# Altium PCB PCB.PcbDoc
Units mil, origin at the board's own origin, x right, y up, seen from the top; angles counter-clockwise.
Board outline 1996.85 x 1458.58 mil, 2 copper layers (Top Layer, Bottom Layer), stack 61.855 mil thick; 58 components, 83 nets, 282 pads, 152 vias.
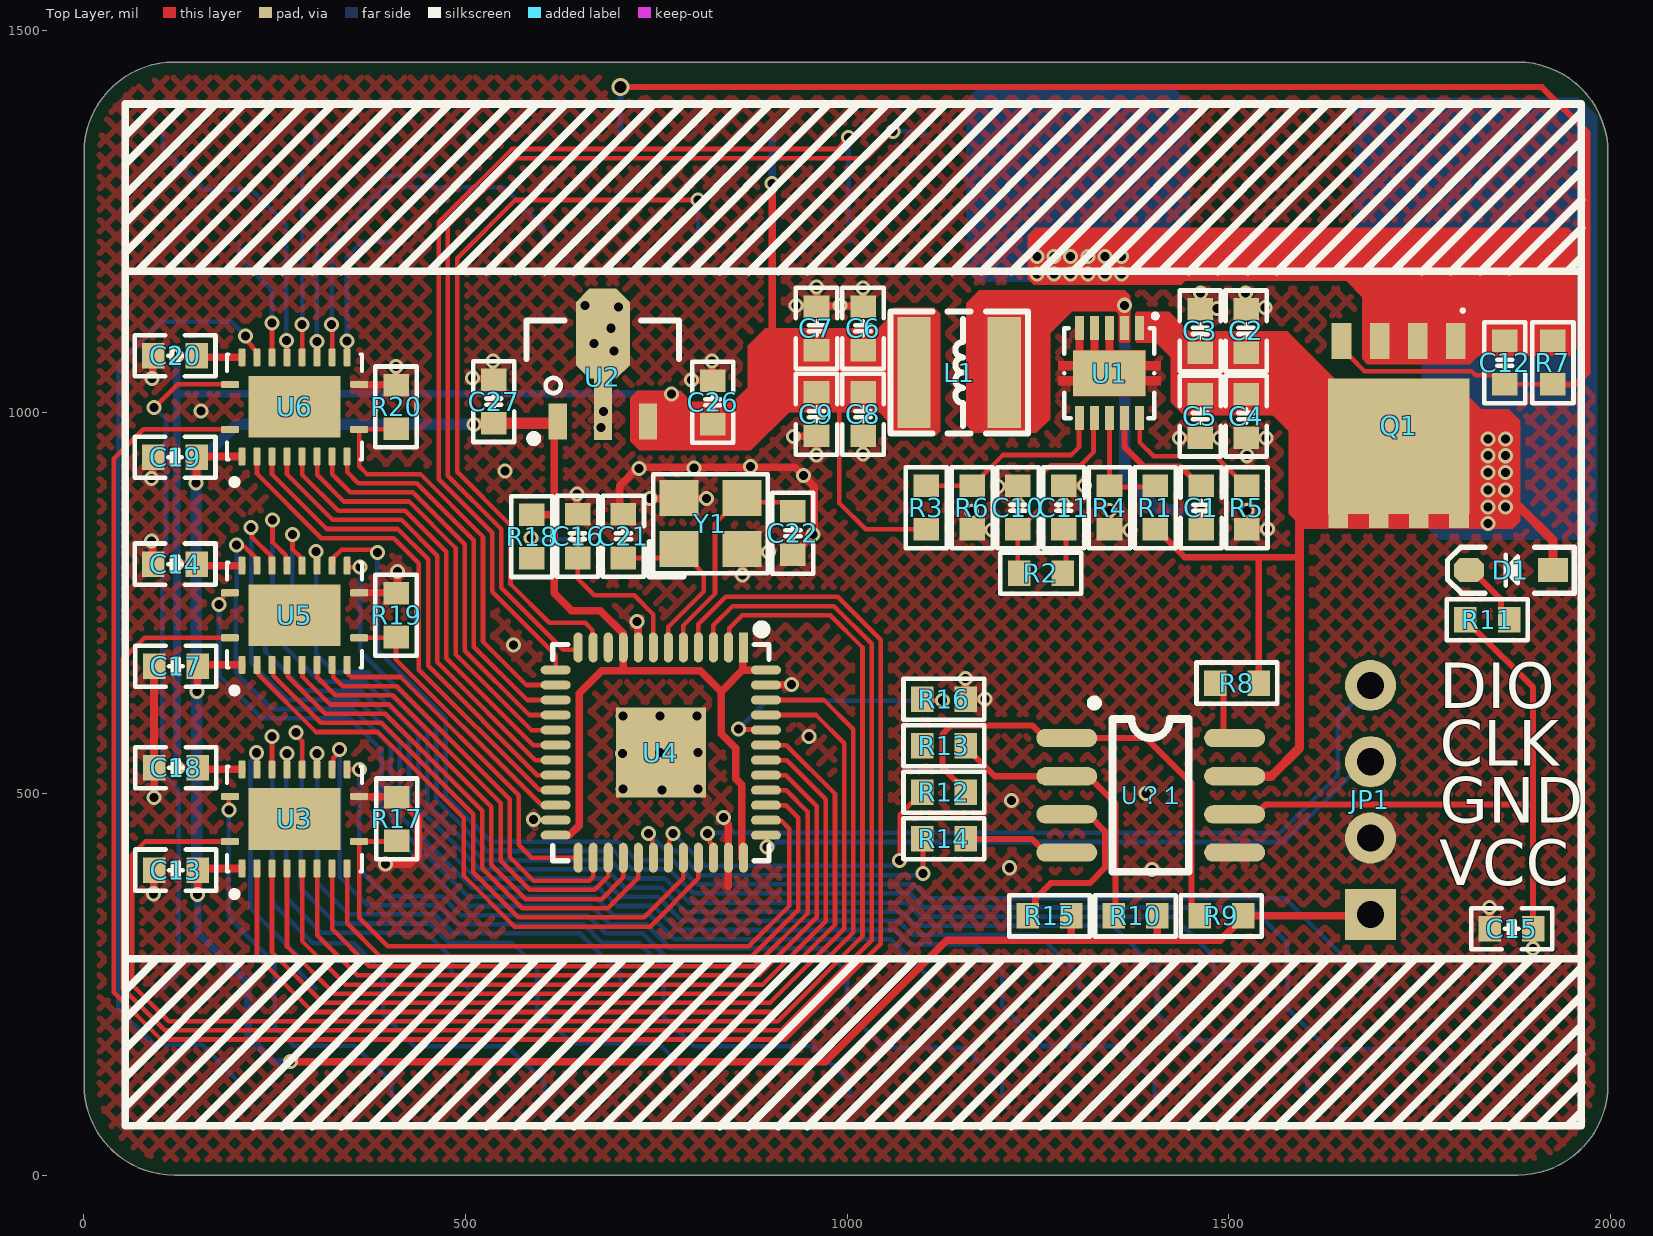
[diagram p0: Top Layer view]
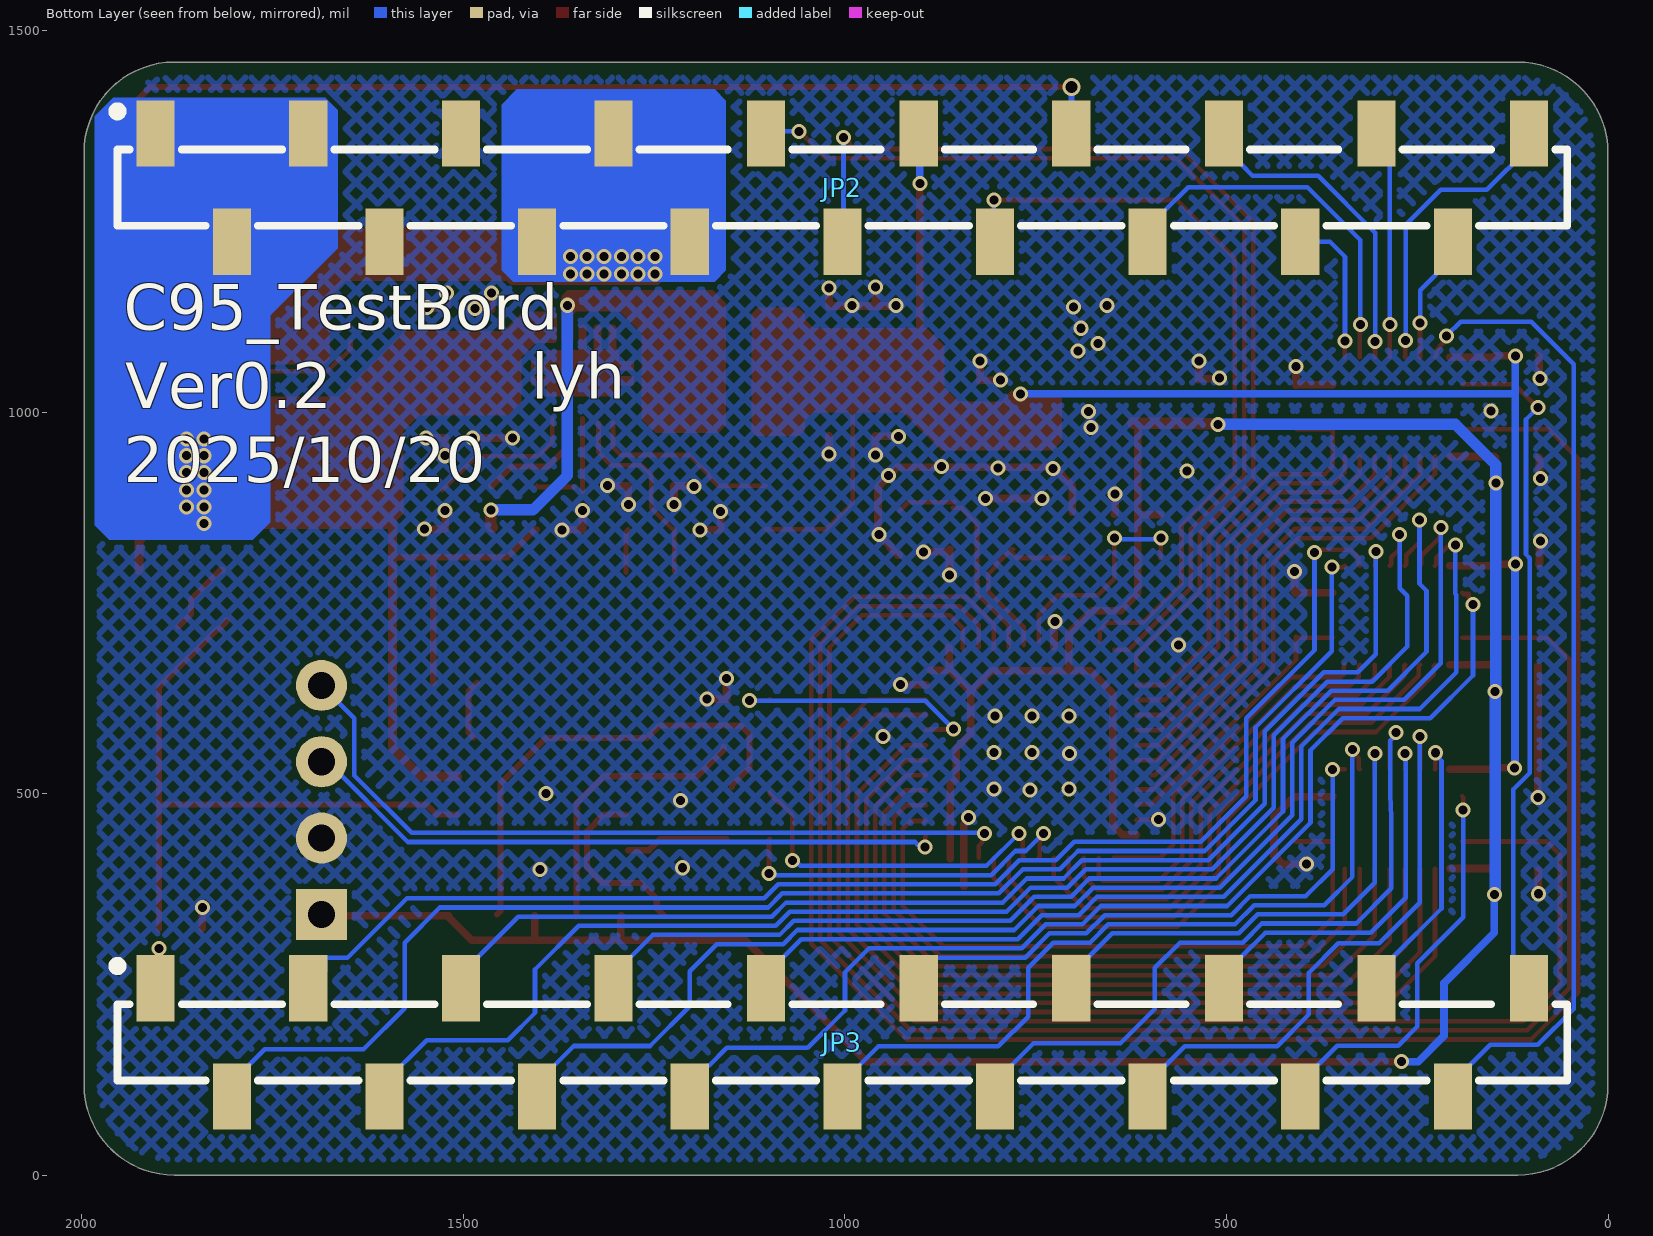
[diagram p1: Bottom Layer view, seen from below]

## Layer stack, top to bottom
Top Solder: solder mask 0.4, Solder Resist, Dk 3.5
Top Layer: signal copper 1.4
Dielectric 1: dielectric 59.0551, FR-4, Dk 4.8
Bottom Layer: signal copper 1.4
Bottom Solder: solder mask 0.4, Solder Resist, Dk 3.5

## Board outline
118.36,0.25 cw(c118.36,118.36) 0.25,118.36 0.25,1340.72 cw(c118.36,1340.72) 118.36,1458.83 1878.99,1458.83 cw(c1878.99,1340.72) 1997.1,1340.72 1997.1,118.36 cw(c1878.99,118.36) 1878.99,0.25

## Design rules (kind name [scope] priority, off if disabled: settings)
BoardOutlineClearance [All] p1: gap=15 ignorepadtopadclearanceinfootprint=FALSE
Clearance [All] p1: gap=6 ignorepadtopadclearanceinfootprint=FALSE except(0: Arc-Text Arc-Hole Track-Text Track-Hole SMDPad-Text SMDPad-Hole THPad-Text THPad-Hole Via-Text Via-Hole Fill-Text Fill-Hole Poly-Text Poly-Hole Region-Text Region-Hole Text-Text Text-Hole; 10: Via-Via)
PolygonConnect [All] p1: thpad.connectstyle=Direct thpad.reliefconductorwidth=10 thpad.reliefentries=4 thpad.polygonreliefangle="45 Angle" thpad.airgapwidth=3 smdpad.connectstyle=Relief smdpad.reliefconductorwidth=10 smdpad.reliefentries=4 smdpad.polygonreliefangle="45 Angle" smdpad.airgapwidth=3 via.connectstyle=Direct via.reliefconductorwidth=10 via.reliefentries=4 via.polygonreliefangle="45 Angle" via.airgapwidth=3
RoutingVias [All] p1: holewidth=15.75 width=23.62 viastyle="Through Hole" minholewidth=11.81 minwidth=19.68 maxholewidth=15.75 maxwidth=39.37
SilkToSolderMaskClearance [IsPad] p1: minsilkscreentomaskgap=0 clearancetoexposedcopper=TRUE
SolderMaskExpansion [IsVia] p1: expansion=1 istentingtop=TRUE useseparateexpansions=TRUE expansionbottom=1 istentingbottom=TRUE soldermaskfromhole=TRUE
Width [All] p1: maxlimit=100 minlimit=6 preferedwidth=10
29 further rules are at their usual default settings.

## Classes and differential pairs
component class PWR: C1 C2 C3 C4 C5 C6 C7 C8 C9 C10 C11 C12 C26 C27 L1 Q1 R1 R2 R3 R4 R5 R6 R7 U1 U2
component class MCU: C13 C14 C15 C16 C17 C18 C19 C20 C21 C22 D1 JP1 R8 R9 R10 R11 R12 R13 R14 R15 R16 R17 R18 R19 R20 U3 U4 U5 U6 U？1 Y1
component class Connector: JP2 JP3

## Components (designator, comment, footprint, x,y, rotation, side; value= is the part's Value field where it differs from the comment)
C1 "100nF/25V" c0603_l 1464,875 r90 top
C2 "10uF/25V" c0603_l 1523,1106.54 r270 top
C3 "10uF/25V" c0603_l 1463,1106.54 r270 top
C4 "1uF/25V" c0603_l 1523,995 r90 top
C5 "3.3nF/25V" c0603_l 1463,995 r90 top
C6 "22uF/16V" c0603_l 1021,1110 r270 top
C7 "22uF/16V" c0603_l 960,1110 r270 top
C8 "22uF/16V" c0603_l 1021,997.46 r90 top
C9 "22uF/16V" c0603_l 960,997.46 r90 top
C10 "68pF/25V" c0603_l 1224,875 r270 top
C11 "560pF/25V" c0603_l 1284,875 r270 top
C12 "100nF 50V" c0603_l 1862,1065 r270 top
C13 "100nF/16V" c0603_l 120.46,400 r180 top
C14 "100nF/16V" c0603_l 119.46,801 r0 top
C15 "220pF/25V" c0603_l 1871,323 r0 top
C16 "100nF/25V" c0603_l 647,837.54 r270 top
C17 "100nF/16V" c0603_l 120.46,667 r180 top
C18 "100nF/16V" c0603_l 120.46,534 r0 top
C19 "100nF/16V" c0603_l 119.46,941 r180 top
C20 "100nF/16V" c0603_l 119.46,1074 r0 top
C21 "22pF/16V" c0603_l 707,837.54 r90 top
C22 "22pF/16V" c0603_l 929,841.54 r270 top
C26 "330nF/16V" c0603_l 824,1013 r270 top
C27 "100nF/16V" c0603_l 537,1014 r270 top
D1 "1N5819" SOD-323 1870,793 r180 top
JP1 "HDR-1X4" HDR2.54-WI-4P 1686,492 r90 top locked
JP2 "HDR-1X19" 贴片排母2.54mm_交错_19P 1903.43,1365.17 r180 bottom locked
JP3 "HDR-1X19" 贴片排母2.54mm_交错_19P 1903.43,245.17 r180 bottom locked
L1 "8.2uH" NR4020 1147,1052 r180 top
Q1 "Pmos_DFN8_5*6" DFN8_5*6 1723,982 r180 top
R1 "1K 1%" r0603_l 1404,875 r90 top
R2 "18.7K 1%" r0603_l 1254,789 r0 top
R3 "100K 1%" r0603_l 1104,875 r90 top
R4 "1K 1%" r0603_l 1344,875 r270 top
R5 "1K 1%" r0603_l 1524,875 r270 top
R6 "19.1K 1%" r0603_l 1164,875 r270 top
R7 "1K 1%" r0603_l 1925,1065 r270 top
R8 "0R 1%" r0603_l 1511,645 r180 top
R9 "2.2K 1%" r0603_l 1490.54,340 r0 top
R10 "2.2K 1%" r0603_l 1378,340 r0 top
R11 "1K 1%" r0603_l 1839,728 r0 top
R12 "100R 1%" r0603_l 1127,502 r0 top
R13 "100R 1%" r0603_l 1127,563 r0 top
R14 "100R 1%" r0603_l 1127,441 r0 top
R15 "5.1K 1%" r0603_l 1265.46,340 r0 top
R16 "10K 1%" r0603_l 1127,624 r0 top
R17 "10K 1%" r0603_l 410,467 r270 top
R18 "10K 1%" r0603_l 587,837.09 r90 top
R19 "10K 1%" r0603_l 409,734 r270 top
R20 "10K 1%" r0603_l 409,1007 r270 top
U1 "TPS54335A-QFN" VSON-10_L3.0-W3.0-P0.50-TL-EP 1344,1051.22 r270 top
U2 "78L33" SOT89_L 680,1000 r0 top
U3 "TXS0108EPWR" TXS0108ERGYR 276,467 r90 top
U4 "STM32F103CBUX" "QFN48 7X7_M" 756,554 r180 top
U5 "TXS0108EPWR" TXS0108ERGYR 276,734 r90 top
U6 "TXS0108EPWR" TXS0108ERGYR 276,1007 r90 top
U？1 "SI1021T" SOP8 1289,574 r0 top
Y1 "25Mhz" "OSC 3225-4P" 821,854 r0 top

## Footprints (in the part's own frame and the unit in brackets; to place one, negate y for a bottom-side part, rotate by r counter-clockwise, add the part's x,y. Pads: shape width x height; smd on the part's side, far side on the other; paste and mask are expansions set on the pad)
c0603_l [mm] "贴片MLCC电容"
  rect 0.75x0.85 smd: 1(-0.725,0) 2(0.725,0)
  silkscreen extent -1.35,-0.69 1.35,0.69, body extent -0.8,-0.4 0.8,0.4, height 0.8
DFN8_5*6 [mm] "TDSON, 8-Leads, Body 6.15x5.15mm, Pitch 1.27mm"
  rect 0.65x1.2 smd: 1(-1.905,-2.825) 2(-0.635,-2.825) 3(0.635,-2.825) 4(1.905,-2.825) 5(-2.007,2.794) 5(-0.66,2.794) 5(0.66,2.794) 5(2.007,2.794)
  rect 4.7x4.5 smd: 5(0,0.675)
  Top Layer region: -2.35,2.925 -1.65,2.925 -1.65,3.425 -2.35,3.425
  Top Layer region: 1.65,2.925 2.35,2.925 2.35,3.425 1.65,3.425
  Top Layer region: -1.015,2.925 -0.315,2.925 -0.315,3.425 -1.015,3.425
  Top Layer region: 0.315,2.925 1.015,2.925 1.015,3.425 0.315,3.425
  silkscreen extent -2.23,-3.94 -2.03,-3.74, body extent -2.58,-3.08 2.58,3.08, height 1
HDR2.54-WI-4P [mm] "弯脚排针，4脚"
  rect 1.7x1.7 hole 0.9: 1(-3.81,0)
  round 1.7 hole 0.9: 2(-1.27,0) 3(1.27,0) 4(3.81,0)
  body extent -5.08,-7.77 5.08,1.27, height 4.85
NR4020 [mm] "4.0mm*4.0mm*2.0mm(长*宽*高）"
  rect 1.1x3.7 smd: 1(-1.5,0) 2(1.5,0)
  silkscreen extent -2.29,-2.03 2.29,2.03, body extent -2,-2 2,2, height 2.1
"OSC 3225-4P" [mm] "3.2*2.5*0.7mm(长宽高)"
  rect 1.3x1.2 smd: 1(-1.05,-0.85) 2(1.05,-0.85) 3(1.05,0.85) 4(-1.05,0.85)
  silkscreen extent -2.03,-1.75 1.91,1.65, body extent -1.6,-1.25 1.6,1.25, height 0.7
"QFN48 7X7_M" [mm] "48脚，长x宽x高：7x7x1mm，脚距：0.5mm"
  rect 0.3x1 smd: 1(-2.75,-3.5)
  oval 0.3x1 smd: 2(-2.25,-3.5) 3(-1.75,-3.5) 4(-1.25,-3.5) 5(-0.75,-3.5) 6(-0.25,-3.5) 7(0.25,-3.5) 8(0.75,-3.5) 9(1.25,-3.5) 10(1.75,-3.5) 11(2.25,-3.5) 12(2.75,-3.5) 25(2.75,3.5) 26(2.25,3.5) 27(1.75,3.5) 28(1.25,3.5) 29(0.75,3.5) 30(0.25,3.5) 31(-0.25,3.5) 32(-0.75,3.5) 33(-1.25,3.5) 34(-1.75,3.5) 35(-2.25,3.5) 36(-2.75,3.5)
  oval 1x0.3 smd: 13(3.5,-2.75) 14(3.5,-2.25) 15(3.5,-1.75) 16(3.5,-1.25) 17(3.5,-0.75) 18(3.5,-0.25) 19(3.5,0.25) 20(3.5,0.75) 21(3.5,1.25) 22(3.5,1.75) 23(3.5,2.25) 24(3.5,2.75) 37(-3.5,2.75) 38(-3.5,2.25) 39(-3.5,1.75) 40(-3.5,1.25) 41(-3.5,0.75) 42(-3.5,0.25) 43(-3.5,-0.25) 44(-3.5,-0.75) 45(-3.5,-1.25) 46(-3.5,-1.75) 47(-3.5,-2.25) 48(-3.5,-2.75)
  rect 3x3 smd mask+0.051: 49(0,0)
  silkscreen extent -3.6,-4.25 3.6,3.6, body extent -3.51,-3.51 3.51,3.51, height 0.95
r0603_l [mm] "1/10W贴片电阻"
  rect 0.75x0.85 smd: 1(-0.725,0) 2(0.725,0)
  silkscreen extent -1.35,-0.69 1.35,0.69, body extent -0.8,-0.4 0.8,0.4, height 0.4
SOD-323 [mm] "1.8x1.3X0.9mm（长宽高，不包括引脚）"
  rect 1x0.8 smd: 1(-1.4,0)
  oct 1x0.8 smd: 2(1.4,0)
  silkscreen extent -2.11,-0.76 2.11,0.76, body extent -1.34,-0.63 1.31,0.67, height 1
SOP8 [mil] "联系卖家 免费查找封装"
  oval 80x24 smd: 1(-1,-1) 2(-1,-51) 3(-1,-101) 4(-1,-151) 5(219,-151) 6(219,-101) 7(219,-51) 8(219,-1)
  silkscreen extent 30,-176 159,50, body extent -12,-173 225,24, height 75
SOT89_L [mm] "4.6x4.3x1.6mm(长宽高)"
  rect 0.6x1.2 smd: 1(-1.5,-0.303) 3(1.5,-0.303)
  rect 0.6x2.1 smd: 2(0,0.127)
  oct 1.8x3 smd: 2(0,2.616)
  silkscreen extent -2.54,-1 2.54,3.05, body extent -2.3,-0.88 2.3,3.42, height 1.6
TXS0108ERGYR [mm]
  rrect40% 0.24x0.6 smd: 1(-0.75,2.15) 10(-0.75,-2.15) 11(0.75,-2.15) 20(0.75,2.15)
  rrect40% 0.6x0.24 smd: 2(-1.65,1.75) 3(-1.65,1.25) 4(-1.65,0.75) 5(-1.65,0.25) 6(-1.65,-0.25) 7(-1.65,-0.75) 8(-1.65,-1.25) 9(-1.65,-1.75) 12(1.65,-1.75) 13(1.65,-1.25) 14(1.65,-0.75) 15(1.65,-0.25) 16(1.65,0.25) 17(1.65,0.75) 18(1.65,1.25) 19(1.65,1.75)
  rect 2.05x3.05 smd paste-3: 21(0,0)
  silkscreen extent -2.6,-2.25 1.75,2.25, body extent -1.75,-2.25 1.75,2.25, height 1
VSON-10_L3.0-W3.0-P0.50-TL-EP [mm]
  rect 0.8x0.3 smd: 1(-1.5,1) 2(-1.5,0.5) 3(-1.5,0) 4(-1.5,-0.5) 5(-1.5,-1) 6(1.5,-1) 7(1.5,-0.5) 8(1.5,0) 9(1.5,0.5) 10(1.5,1)
  rect 1.52x2.4 smd: 11(0.002,-0.009)
  Top Layer region: -0.758,1.191 -0.398,1.191 -0.398,1.706 -0.098,1.706 -0.098,1.191 0.102,1.191 0.102,1.706 0.402,1.706 0.402,1.191 0.761,1.191 0.761,-1.209 0.402,-1.209 0.402,-1.714 0.102,-1.714 0.102,-1.209 -0.098,-1.209 -0.098,-1.714 -0.398,-1.714 -0.398,-1.209 -0.759,-1.209 -0.759,0.886 -0.758,0.886 -0.758,1.191
  silkscreen extent -1.98,-1.5 1.5,1.6, body extent -1.51,-1.52 1.51,1.5, height 0.61
贴片排母2.54mm_交错_19P [mm] "贴片排母2.54mm_交错_16P"
  rect 1.27x2.2 smd: 1(0,0) 2(2.54,-3.6) 3(5.08,0) 4(7.62,-3.6) 5(10.16,0) 6(12.7,-3.6) 7(15.24,0) 8(17.78,-3.6) 9(20.32,0) 10(22.86,-3.6) 11(25.4,0) 12(27.94,-3.6) 13(30.48,0) 14(33.02,-3.6) 15(35.56,0) 16(38.1,-3.6) 17(40.64,0) 18(43.18,-3.6) 19(45.72,0)
  silkscreen extent -1.42,-3.07 46.99,0.89, body extent -1.5,-4.24 39.64,0.66, height 5.3

## Part data
C1 C2 C3 C4 C5 C6 C7 C8 C9 C10 C11 C12 C13 C14 C15 C16 C17 C18 C19 C20 C21 C22 C26 C27: library part C, "无极性贴片电容", BOM名称=无极性贴片电容, 学习资源=www.ooocke.com, 材质=X7R, 版权归属=源创客
D1: "肖特基二极管", BOM名称=肖特基二极管, 学习资源=www.ooocke.com, 属性=40V/2A, 版权归属=源创客
JP1: library part "Header 4", "4P接插件", BOM名称=4P接插件, 学习资源=www.ooocke.com, 版权归属=源创客
JP2 JP3: library part "Header 19", "19P接插件", BOM名称=19P接插件, 学习资源=www.ooocke.com, 版权归属=源创客
L1: library part L, "小功率贴片电感", BOM名称=小功率贴片电感, 学习资源=www.ooocke.com, 版权归属=源创客
R1 R2 R3 R4 R5 R6 R7 R8 R9 R10 R11 R12 R13 R14 R15 R16 R17 R18 R19 R20: library part R, "贴片电阻", BOM名称=贴片电阻, 学习资源=www.ooocke.com, 版权归属=源创客
U1: "BUCK"
U3 U5 U6: "适用于开漏和推挽应用的八位双向电压电平转换器"
U？1: "SI1021T LIN收发器"
Y1: library part Crystal
Q1: BOM名称=场效应管, 学习资源=www.ooocke.com, 描述="P沟道 30V/4.2A", 版权归属=源创客

## Via types
v1: diameter 19.68, hole 11.81, Top Layer to Bottom Layer, tented both sides, 151 vias
v2: diameter 23.62, hole 15.75, Top Layer to Bottom Layer, tented both sides, 1 vias

## Nets (pads, with @x,y where several pads share a name; then routed paths per layer and width w, separated by ;. In a path a pad name is that pad's centre, name@x,y a point inside that pad or via, vN(x,y) a via of type N, cw(c..) or ccw(c..) an arc to the next point about the centre after c; other vN are vias at no path point)
BOOT: R16.1 U4.44 | length 346
  Top Layer w6: v1(858,585) 858.74,584.26 893.06,584.26 U4.44 ; R16.1 1100.46,622 v1(1124.94,622)
  Bottom Layer w6: v1(858,585) 895,622 v1(1124.94,622)
Buttom: JP2.12 U4.11 | length 1006.6
  Top Layer w6: U4.11@666.31,699.31 666.31,714.69 657,724 609.93,724 559,774.93 559,851.91 489,921.91 489,1202 565.16,1278.16 v1(805,1278.16)
  Bottom Layer w6: JP2.12 805,1225 v1(805,1278.16)
FAN1_ID1_STC: JP2.18 U6.17 | length 169.3
  Top Layer w6: v1(246.3,1116.66) 246.47,1116.49 U6.17
  Bottom Layer w6: JP2.18 203.43,1202.88 246.3,1160 v1(246.3,1116.66)
FAN1_ID1_STM: U3.1 U4.2 | length 1933.9
  Top Layer w6: U3.1 80.46,437.47 63,420.02 63,249.97 110.97,202 909.06,202 1020.29,313.23 1020.29,691.71 978,734 862.51,734 845.69,717.18 845.69,690.69 U4.2@845,690
FAN1_ID2_STC: JP2.17 U6.15 | length 300.5
  Top Layer w6: U6.15 285.84,1114.95 v1(286.02,1115.13)
  Bottom Layer w6: v1(286.02,1115.13) 286.02,1329.45 303.43,1346.86 JP2.17
FAN1_ID2_STM: U3.3 U4.46 | length 1366.4
  Top Layer w6: U3.3 226.79,287.21 300,214 904.09,214 1008.29,318.2 1008.29,584.38 969.77,622.9 U4.46
FAN1_ID3_STC: JP2.19 U6.16 | length 396.2
  Top Layer w6: v1(265.31,1093.86) 265.74,1093.44 265.74,1072.38 U6.16
  Bottom Layer w6: JP2.19 103.43,1346.86 158.78,1291.5 219.5,1291.5 265.31,1245.69 v1(265.31,1093.86)
FAN1_ID3_STM: U3.4 U4.45 | length 1288
  Top Layer w6: U3.4 246.47,292.53 313,226 899.12,226 996.29,323.17 996.29,566.25 959.33,603.21 U4.45
FAN2_ID1_STC: JP3.17 U3.18 | length 369.2
  Top Layer w6: v1(226.16,553.78) 226.47,553.46 226.47,532.28 U3.18
  Bottom Layer w6: v1(226.16,553.78) 226.16,551.29 218.29,543.42 218.29,349.71 281.43,286.57 281.43,267.17 JP3.17
FAN2_ID1_STM: U3.5 U4.43 | length 1172.1
  Top Layer w6: U3.5 266.16,299.84 328,238 894.15,238 984.29,328.14 984.29,500.07 920.52,563.84 U4.43
FAN2_ID2_STC: JP3.18 U6.18 | length 1287.5
  Top Layer w6: v1(212,1100) 214.62,1097.38 214.62,1092.6 220.83,1086.39 220.83,1085.01 225.06,1080.77 225.06,1073.68 U6.18
  Bottom Layer w6: JP3.18@202,109 202,123.16 154.16,171 92,171 45,218 45,1063 100.84,1118.84 193.16,1118.84 v1(212,1100)
FAN2_ID2_STM: U3.6 U4.42 | length 1098.8
  Top Layer w6: U3.6 285.84,307.16 343,250 889.18,250 972.29,333.11 972.29,492.65 920.78,544.16 U4.42
FAN2_ID3_STC: JP3.19 U6.20 | length 898.8
  Top Layer w6: v1(92,1006) 122.76,1036.76 191.12,1036.76 U6.20
  Bottom Layer w6: v1(92,1006) 107.52,990.48 107.52,813.65 102.68,808.8 102.68,527.2 124,505.87 124,265.74 JP3.19
FAN2_ID3_STM: U3.7 U4.41 | length 1024.7
  Top Layer w6: U3.7 305.53,314.47 358,262 884.21,262 960.29,338.08 960.29,483.85 919.67,524.47 U4.41
FAN3_ID1_STC: JP3.14 U3.17 | length 765.7
  Top Layer w6: U3.17 246.47,575.01 v1(246.68,575.22)
  Bottom Layer w6: v1(246.68,575.22) 247,574.9 247,357 300,304 353.4,304 392,265.4 392,211 433.72,169.28 554.72,169.28 580.27,143.73 581.43,143.73 603.43,121.73 JP3.14
FAN3_ID1_STM: U3.8 U4.40 | length 950.9
  Top Layer w6: U3.8 325.21,322.79 374,274 879.24,274 948.29,343.05 948.29,476.69 920.19,504.79 U4.40
FAN3_ID2_STC: JP3.15 U3.16 | length 508
  Top Layer w6: v1(265.84,552.54) 266,552.39 266,532.12 U3.16
  Bottom Layer w6: v1(265.84,552.54) 265,551.7 265,364 311,318 449,318 481.43,285.57 481.43,267.17 JP3.15
FAN3_ID2_STM: U3.9 U4.39 | length 876.2
  Top Layer w6: U3.9 344.9,330.1 388,287 875.27,287 936.29,348.02 936.29,468.39 919.58,485.1 U4.39
FAN3_ID3_STC: JP3.16 U3.20 | length 529
  Top Layer w6: v1(190,479) 190,495.17 U3.20
  Bottom Layer w6: v1(190,479) 190,338 250,278 250,195.01 275,170.01 355.15,170.01 403.43,121.73 JP3.16
FAN3_ID3_STM: U4.3 U5.1 | length 2292
  Top Layer w6: U5.1 79.4,704.47 51,676.07 51,245 106,190 914.03,190 1032.29,308.26 1032.29,696.68 982.97,746 850,746 824.9,720.9 U4.3
FAN4_ID1_STC: JP3.11 U3.12 | length 737.1
  Top Layer w6: U3.12 U3.12 v1(361,532)
  Bottom Layer w6: v1(361,532) 361,400.97 395.97,366 468.88,366 493.88,341 659.84,341 683.84,317 731.97,317 763.97,285 881.43,285 885,281.43 JP3.11@885,265
FAN4_ID1_STM: U4.33 U5.3 | length 824.4
  Top Layer w6: U5.3 228.51,667.32 228.51,656.56 304.08,581 385.03,581 437.08,528.95 498,468.03 498,392.27 564.27,326 742.02,326 805.21,389.2 U4.33
FAN4_ID2_STC: JP3.12 U3.15 | length 933.8
  Top Layer w6: v1(278.2,580.22) 278.2,576.52 285.84,568.88 U3.15
  Bottom Layer w6: v1(278.2,580.22) 278.2,576.88 285.21,569.87 285.21,498.14 284,469.5 284,376 330,330 453.97,330 478.97,305 561,305 594,272 594,218 639,173 753,173 781.43,144.57 781.43,125.43 JP3.12
FAN4_ID2_STM: U4.32 U5.4 | length 776
  Top Layer w6: U5.4 248.2,667.32 248.2,654.91 310.11,593 390,593 449.08,533.92 510,473 510,397.24 569.24,338 734.33,338 785.53,389.19 U4.32
FAN4_ID3_STC: JP3.13 U3.14 | length 656.5
  Top Layer w6: U3.14 305.63,532.07 305.63,552.89 v1(305.74,553)
  Bottom Layer w6: v1(305.74,553) 305.74,383.26 347,342 458.94,342 483.94,317 649.9,317 703.43,263.47 JP3.13
FAN4_ID3_STM: U4.29 U5.5 | length 687.8
  Top Layer w6: U5.5 267.31,667.88 267.31,654.04 316.35,605 394.97,605 453.99,545.99 522,477.97 522,402.21 574.21,350 686.54,350 726.47,389.93 U4.29
FAN5_ID1_STC: JP3.2 U5.12 | length 1928.1
  Top Layer w6: U5.12 344.9,798.72 346.62,797 v1(362,797)
  Bottom Layer w6: v1(362,797) 362,686.82 462,586.82 462,491.68 528.68,425 694.63,425 718.63,401 766.76,401 798.29,369.47 1082.28,369.47 1100.75,351 1531,351 1577,305 1577,219 1631,165 1760.16,165 1803.43,121.73 JP3.2
FAN5_ID1_STM: U4.28 U5.6 | length 638.8
  Top Layer w6: U5.6 286.44,668.45 286.44,653.48 322.91,617 399.94,617 406.47,610.47 534,482.94 534,407.18 579.18,362 678.36,362 706.79,390.42 U4.28
FAN5_ID2_STC: JP3.3 U5.13 | length 1775.1
  Top Layer w6: U5.13 326.94,800.68 326.94,809.16 337.55,819.77 377.36,819.77 380.97,816.16 v1(384.68,816.16)
  Bottom Layer w6: v1(384.68,816.16) 384.68,688.27 474,598.94 474,496.65 533.65,437 699.6,437 723.6,413 771.73,413 803.26,381.47 1087.25,381.47 1105.72,363 1574,363 1652,285 1681.43,285 1681.43,267.17 JP3.3
FAN5_ID2_STM: U4.27 U5.7 | length 589.4
  Top Layer w6: U5.7 305.53,652.86 329.39,629 404.91,629 546,487.91 546,412.15 584.15,374 669.31,374 687.1,391.79 U4.27
FAN5_ID3_STC: JP3.4 U5.15 | length 1881.1
  Top Layer w6: v1(273.17,839.55) 273.3,839.42 273.3,820.7 284.12,809.88 284.12,800.68 U5.15
  Bottom Layer w6: v1(273.17,839.55) 273.17,769.51 263,759.34 263,693 308.93,647.07 367.82,647.07 438,576.88 438,481.73 518.73,401 684.69,401 708.69,377 756.82,377 788.35,345.47 1072.34,345.47 1090.81,327 1349,327 1406.22,269.78 1406.22,212.78 1442,177 1548.16,177 1603.43,121.73 JP3.4
FAN5_ID3_STM: U4.26 U5.8 | length 539.2
  Top Layer w6: U5.8 326.94,667.32 326.94,653.06 339,641 409.88,641 558,492.88 558,417.12 589.12,386 662,386 667.42,391.41 U4.26
FAN6_ID1_STC: JP3.5 U5.14 | length 1600.6
  Top Layer w6: v1(304.22,817.42) 304.87,816.77 304.87,799.62 U5.14
  Bottom Layer w6: v1(304.22,817.42) 304.22,682.78 327.93,659.07 372.79,659.07 450,581.85 450,486.71 523.71,413 689.66,413 713.66,389 761.79,389 793.32,357.47 1077.31,357.47 1095.78,339 1428,339 1481.43,285.57 1481.43,267.17 JP3.5
FAN6_ID1_STM: U4.25 U5.9 | length 451.9
  Top Layer w6: U5.9 346.62,667.32 346.62,656.51 350.14,653 414.85,653 570,497.85 570,433 586.8,416.2 U4.25
FAN6_ID2_STC: JP3.6 U5.17 | length 1752
  Top Layer w6: v1(219.05,848.87) 220.72,847.2 220.72,835.89 244.75,811.87 244.75,800.68 U5.17
  Bottom Layer w6: v1(219.05,848.87) 219.05,670.95 266.93,623.07 357.87,623.07 414,566.94 414,471.79 508.79,377 674.75,377 698.75,353 746.88,353 778.41,321.47 1062.4,321.47 1080.87,303 1168,303 1203.59,267.41 1203.59,221.41 1255.48,169.52 1355.48,169.52 1381.27,143.73 1381.43,143.73 1403.43,121.73 JP3.6
FAN6_ID2_STM: U4.4 U6.1 | length 2658.2
  Top Layer w6: U6.1 77.53,977.47 39,938.94 39,240.03 101.03,178 919,178 1044.29,303.29 1044.29,701.65 987.94,758 841,758 830,747 805.21,722.21 U4.4 805.21,690.79 U4.4@806,690
FAN6_ID3_STC: JP3.7 U5.16 | length 1558.6
  Top Layer w6: v1(247.07,858.68) 247.07,829.96 264.43,812.6 264.43,800.68 U5.16
  Bottom Layer w6: v1(247.07,858.68) 247.07,775.13 237.9,765.95 237.9,686.1 288.93,635.07 362.84,635.07 426,571.91 426,476.76 513.76,389 679.72,389 703.72,365 751.85,365 783.38,333.47 1067.37,333.47 1085.84,315 1251.9,315 1281.43,285.47 1303.43,263.47 JP3.7
FAN6_ID3_STM: U4.21 U6.3 | length 667.6
  Top Layer w6: U6.3 226.79,919.21 311,835 406.21,835 439,802.21 439,662.79 589.32,512.47 596.18,505.62 617.37,505.62 U4.21
FAN7_ID1_STC: JP3.10 U3.13 | length 1033.1
  Top Layer w6: U3.13 326.94,533.68 326.94,546.39 334.98,554.43 v1(334.98,558.14)
  Bottom Layer w6: v1(334.98,558.14) 334.98,391.02 372,354 463.91,354 488.91,329 654.87,329 678.87,305 727,305 760,272 760,208 799,169 956.16,169 1003.43,121.73 JP3.10
FAN7_ID1_STM: U4.20 U6.4 | length 620.1
  Top Layer w6: U6.4 246.47,918.53 318,847 411.18,847 451,807.18 451,667.76 594.29,524.47 598.2,524.47
FAN7_ID2_STC: JP3.9 U5.18 | length 1341
  Top Layer w6: 210.74,823.48 225.06,809.16 225.06,800.68 U5.18
  Bottom Layer w6: v1(200.02,826.1) 200.02,761.96 198.98,760.92 198.98,659.02 246.93,611.07 352.9,611.07 402,561.97 402,466.82 503.82,365 669.78,365 693.78,341 741.91,341 773.44,309.47 1057.43,309.47 1103.43,263.47 JP3.9
FAN7_ID2_STM: U4.19 U6.5 | length 612.3
  Top Layer w6: U6.5 266.16,918.58 325.74,859 416.15,859 463,812.15 463,672.73 591.58,544.16 U4.19
FAN7_ID3_STC: JP3.8 U5.20 | length 1469.3
  Top Layer w6: v1(177,748) 177,751.7 182.54,757.25 182.54,761.8 189.63,761.8 U5.20
  Bottom Layer w6: v1(177,748) 177,655 232.93,599.07 347.93,599.07 390,557 390,461.85 498.85,353 664.81,353 688.81,329 736.94,329 768.47,297.47 968.53,297.47 1000,266 1000,216 1049,167 1155,167 1178.27,143.73 1181.43,143.73 1203.43,121.73 JP3.8
FAN7_ID3_STM: U4.18 U6.6 | length 584.6
  Top Layer w6: U6.6 285.84,918.2 333.05,871 421.12,871 475,817.12 475,677.71 588.86,563.84 U4.18
FAN8_ID1_STC: JP2.16 U6.12 | length 198.7
  Top Layer w6: v1(344.75,1093.25) 344.82,1093.18 344.82,1072.04 U6.12
  Bottom Layer w6: v1(344.75,1093.25) 344.75,1203.75 364.43,1223.43 JP2.16
FAN8_ID1_STM: U4.17 U6.7 | length 556.8
  Top Layer w6: U6.7 305.53,918.13 340.66,883 426.09,883 487,822.09 487,682.68 586.15,583.53 U4.17
FAN8_ID2_STC: JP2.15 U6.14 | length 426
  Top Layer w6: v1(305.38,1092.62) 305.45,1092.55 U6.14 U6.14
  Bottom Layer w6: v1(305.38,1092.62) 305.38,1235.38 380,1310 466,1310 480.86,1324.86 481.43,1324.86 503.43,1346.86 JP2.15
FAN8_ID2_STM: U4.16 U6.8 | length 528.7
  Top Layer w6: U6.8 325.21,918.61 348.83,895 431.06,895 499,827.06 499,687.65 583.43,603.21 U4.16
FAN8_ID3_STC: JP2.14 U6.13 | length 501.8
  Top Layer w6: v1(324.71,1115.15) 325.21,1114.65 U6.13
  Bottom Layer w6: v1(324.71,1115.15) 324.71,1225.74 393.97,1295 550.16,1295 581.43,1263.73 603.43,1241.73 JP2.14
FAN8_ID3_STM: U4.15 U6.9 | length 499.1
  Top Layer w6: U6.9 344.9,921.63 359.53,907 436.03,907 511,832.03 511,692.62 580.72,622.9 U4.15
GND: C2.1 C3.1 C4.1 C5.1 C6.1 C7.1 C8.1 C9.1 C10.1 C11.1 C13.2 C14.1 C15.1 C16.1 C17.2 C18.1 C19.2 C20.1 C21.2 C22.2 C26.1 C27.1 JP1.2 JP2.4 JP2.5 R4.2 R5.2 R6.2 R16.2 R17.1 R19.1 R20.1 U1.3 U1.4 U1.5 U1.11 U2.2 U3.11 U4.8 U4.23 U4.35 U4.47 U4.49 U5.11 U6.11 U？1.5 Y1.2 Y1.4 | length 2463.1
  Top Layer w6: v1(589,466) 589.29,465.71 617.91,465.71 U4.23
  Top Layer w10: v1(88.68,831) 89.8,829.88 89.8,802.12 C14.1 ; v1(88.68,913) 89.8,914.12 89.8,939.88 C19.2 ; v1(89,1044) 89.96,1044.96 89.96,1073.04 C20.1 ; v1(91,369) 91.46,369.46 91.46,399.54 C13.2 ; C17.2 C18.1 91.96,533.96 v1(92,495) v1(92,495) ; U3.11 360.92,496.25 R17.1@410,496.25 ; U5.11 360.92,763.25 R19.1@407.75,763.25 ; U6.11 360.92,1036.25 R20.1@404.75,1036.25 ; v1(395,407.85) 426.45,407.85 437.73,419.14 437.73,469.78 411.97,495.54 R17.1 ; R19.1 411,764.54 v1(411,791) ; R20.1 v1(409,1060) ; v1(509,1044.84) 510.15,1043.69 535.85,1043.69 C27.1@536,1043.54 ; v1(536,1067) C27.1@536,1043.54 ; C27.1 C27.1@536,1043.54 ; v1(646,893) 646,867.09 C16.1 ; C21.2@702,869.12 702,903.65 726.09,927.74 931.26,927.74 956.73,902.27 956.73,840.73 940.73,824.73 940.73,822.76 930.97,813 C22.2 ; v1(725,726) 726.13,724.87 726.13,692.14 U4.8 ; v1(742,887) 779.2,887 Y1.4 780.13,887 v1(816,887) ; v1(796,1042) 796.23,1041.77 C26.1@823.77,1041.77 ; v1(823,1067) 823,1042.54 C26.1@823.77,1041.77 ; C26.1 C26.1@823.77,1041.77 ; v1(838.17,469.2) 838.17,466.58 844.58,460.17 U4.35 844.58,379.58 844,379 ; Y1.2 Y1.2@863,819.87 ; v1(863,787) Y1.2@863,819.87 ; U4.47 894,642.79 926.79,642.79 v1(927,643) ; v1(897,817) 865.87,817 Y1.2@863,819.87 ; v1(930,968) 930.46,968.46 959.54,968.46 C9.1 v1(960,944) ; v1(933,1140) 933.73,1139.27 959.27,1139.27 C7.1 ; v1(960,1164) C7.1 ; v1(1021,945) C8.1 ; v1(1021,1163) C6.1 1020.27,1139.27 991.73,1139.27 v1(991,1140) 990.27,1139.27 960.73,1139.27 C7.1 ; v1(1155,651) 1155.27,650.73 1155.27,624.27 R16.2 v1(1181,624) ; v1(1163,870) 1163,847.46 R6.2 1164.23,846.23 1189.77,846.23 v1(1190,846) ; v1(1198,903) 1198.27,903.27 1223.73,903.27 C10.1 v1(1224,879) ; v1(1284,879) C11.1 1284.23,903.77 1310.77,903.77 v1(1311,904) ; U1.5 1304.62,1076.08 1329.55,1051.16 U1.11 ; U1.4 1324.32,1070.49 U1.11 ; v1(1344,871) R4.2 1344.23,846.23 1370.77,846.23 v1(1371,846) ; U1.3 1343.99,1051.51 U1.11 ; v1(1436,966) 1436.23,966.23 1462.77,966.23 C5.1 1463.23,966.23 1487.77,966.23 v1(1488,966) ; v1(1463,1156.16) C3.1 1463.46,1135.54 1484.54,1135.54 v1(1485,1136) ; v1(1522,1156.16) 1522,1136.09 C2.1 1523.96,1136.04 1547.04,1136.04 v1(1548,1137) ; C4.1 C4.1@1523.23,966.23 ; v1(1524,871) R5.2 1524.27,846.73 1550.73,846.73 v1(1551,847) ; v1(1524,943) 1524,965.46 C4.1@1523.23,966.23 ; v1(1549,966) 1548.77,966.23 C4.1@1523.23,966.23 ; v1(1842,351) 1842.23,350.77 1842.23,323.23 C15.1
  other v1: 1399.68,401.07 1212.68,403.07 1215.68,491.07 1391.68,500.07 757.68,505.07 706.68,506.07 804.68,506.07 705.68,553.07 754.68,554.07 804.68,554.07 950,575 706.68,602.07 754.68,602.07 803.68,602.07 562.68,695.07 955.68,840.07 942.68,917.07 551.68,923.07 727.68,926.07 799.68,927.07 873.68,929.07 677.68,980.07 680.68,1001.07 153.34,1001.69 694.68,1080.07 668.68,1090.07 690.68,1110.07 700.68,1138.07 656.68,1140.07
LIN_BUS: C15.2 JP3.1 R11.1 U？1.6 | length 838.2
  Top Layer w8: U？1.6 1535.69,473 1548.69,486 1898,486 ; R11.1 1810.46,726.03 1821.22,715.27 1823.19,715.27 1899,639.46 1899,486 C15.2@1899,323
  other v1: 1899,297
NetC1_1: C1.1 L1.1 U1.2 | length 395.9
  Top Layer w8: U1.2 U1.2 1363.74,1140.15 v1(1363.8,1140.2)
  Top Layer w15: C1.1@1462,849 1464,851 v1(1464,872)
  Bottom Layer w15: v1@1363,1140 1363.8,1139.2 1363.8,917.2 1409,872 v1(1464,872)
NetC1_2: C1.2 U1.9 | length 158.9
  Top Layer w6: U1.9@1363.68,990 U1.9
  Top Layer w8: U1.9@1363.68,989.68 1363.68,954.32 1388.9,929.1 1436.47,929.1 1462.03,903.54 C1.2
NetC10_2: C10.2 R2.1 U1.7 | length 260.6
  Top Layer w6: R2.1@1223,791 1224,792 C10.2 1225.97,846.46 1254,874.49 1254,917.77 1266.79,930.56 1306.12,930.56 1323,947.44 U1.7@1323,986
NetC11_2: C11.2 R2.2 | length 57.7
  Top Layer w6: C11.2 1287,843.46 R2.2@1287,790
NetD1_2: D1.2 R11.2 | length 100.8
  Top Layer w8: D1.2 1818.82,793 1856.78,755.04 1856.78,736.22 R11.2@1874,719
NetR1_2: R1.2 R4.1 U1.8 | length 145.8
  Top Layer w6: R4.1@1343.99,896 U1.8 ; R4.1@1355,902 1402.46,902 R1.2
NetR5_1: R5.1 U1.10 | length 201.7
  Top Layer w6: U1.10 1383.37,960.63 1401.84,942.16 1440.38,942.16 1440.44,942.1 1483.47,942.1 R5.1@1527.57,898
NetR8_2: R8.2 U？1.8 | length 78
  Top Layer w8: R8.2 1493.22,634.24 1493.22,580.22 U？1.8@1487,574
NetR9_1: R9.1 R12.2 U？1.1 | length 614.9
  Top Layer w8: R12.2@1148,509 1148,511.51 1125,534.51 1125,578.09 1136.64,589.73 1242.79,589.73 1259.52,573 1392,573 1451.24,513.76 1451.24,346.76 R9.1@1456,342
NetR10_1: R10.1 R13.2 U？1.2 | length 375.1
  Top Layer w8: R13.2@1159,562 1159,557.57 1193.57,523 U？1.2 1316,523 1352,487 1352,340 R10.1@1353,339
NetR14_2: R14.2 U？1.4 | length 134.7
  Top Layer w8: R14.2 1242,441 1257,426 U？1.4@1284,426
NetR15_1: R15.1 U？1.3 | length 242
  Top Layer w8: R15.1 1246.69,349.78 1246.69,362.69 1267,383 1318.18,383 1338,402.82 1338,451 1316,473 U？1.3
NRST: C16.2 R18.1 U4.7 | length 296.3
  Top Layer w6: v1(586,835.02) 586,809.54 R18.1 ; v1(647,835.48) 647,782 669,760 721,760 746,735 U4.7@746,700
  Bottom Layer w6: v1(586,835.02) 587.52,833.5 645.02,833.5 v1(647,835.48)
OE_1: R17.2 U3.10 U4.38 | length 887.3
  Top Layer w6: R17.2 409.02,437.47 U3.10 360.65,337.35 398,300 871.29,300 924.29,352.99 924.29,454.24 914.23,464.31 894.91,464.31 U4.38
OE_2: R19.2 U4.22 U5.10 | length 366.6
  Top Layer w6: U5.10 408.02,704.47 R19.2 409,675.82 584.35,500.47 598.61,486.21 617.09,486.21 U4.22
OE_3: R20.2 U4.14 U6.10 | length 554.1
  Top Layer w6: R20.2 408.02,977.47 U6.10 360.65,929.35 371,919 441,919 523,837 523,699 579.42,642.58 U4.14
Power_ON: C12.2 JP2.13 Q1.4 R7.2 | length 2026
  Top Layer w6: Q1.4 1648,1082.39 1657.8,1072.6 1659.4,1072.6 1678,1054 1818.26,1054 1824.04,1048.22 1850.24,1048.22 C12.2 R7.2
  Top Layer w8: v2(703,1426) 1910.57,1426 1970.54,1366.02 1970.54,1052.45 1954.55,1036.46 R7.2
  Bottom Layer w8: v2(703,1426) 703,1365.59 JP2.13
Screen_RX: JP2.10 U4.13 | length 1370.1
  Top Layer w6: U4.13 618.2,681.79 535,764.99 535,841.97 465,911.97 465,1249 561,1345 987,1345 999,1357 v1@1003,1357
  Bottom Layer w6: v1(1002,1360) 1002,1224.85 JP2.10
Screen_TX: JP2.9 U4.12 | length 1315.5
  Top Layer w6: U4.12@647,689 627.96,689 547,769.96 547,846.94 477,916.94 477,1244.03 565.97,1333 1025,1333 v1(1060,1368)
  Bottom Layer w6: v1(1060,1368) 1100.59,1368 JP2.9
SI1021_RX: R12.1 U4.31 | length 444
  Top Layer w6: U4.31 766.95,417.32 766.95,439.25 ; v1(1069,412.31) 1069,472.54 1084.72,488.27 1086.69,488.27 1098.46,500.03 R12.1
  Bottom Layer w6: v1(772,448) 814.53,405.47 1058.64,405.47 1065.49,412.31 v1(1069,412.31)
SI1021_SLP: R13.1
SI1021_TX: R14.1 U4.30 | length 452.4
  Top Layer w6: 745.05,439.25 745.05,417.32 U4.30 ; R14.1 1099.61,439.85 v1(1099.61,395.7)
  Bottom Layer w6: v1(740,448) 763,425 776.7,425 808.23,393.47 1097.38,393.47 v1(1099.61,395.7)
SWCLK: JP1.3 U4.37 | length 853.6
  Top Layer w6: U4.37 895,444.53 v1(895,430)
  Bottom Layer w6: v1(895,430) 897.62,432.62 903.98,432.62 908.2,436.84 1572.84,436.84 1678,542 JP1.3
SWDIO: JP1.4 U4.34 | length 1027.8
  Top Layer w6: v1(817.39,448) 820.01,445.38 820.01,436.44 824.9,431.56 U4.34
  Bottom Layer w6: v1(817.39,448) 818.24,448.84 1567.87,448.84 1643,523.97 1643,599 JP1.4
VCC3V3: C13.1 C17.1 C19.1 C27.2 JP1.1 R9.2 R10.2 R15.2 R18.2 U2.1 U3.2 U4.1 U4.9 U4.24 U4.36 U4.48 U5.2 U6.2 | length 4320.8
  Top Layer w10: v1(147,907) 147.5,907.5 147.5,940.5 C19.1 149.04,942.04 U6.2 ; v1(148,634) 148.5,634.5 148.5,666.5 151.04,669.04 U5.2 ; v1(149,368) 149,398 153.04,402.04 U3.2 ; v1(271,149) 971.73,149 1131,308.27 1294,308.27 ; R18.2 614.63,865.63 ; U2.1@616.2,985.46 616.2,762.8 639,740 676.59,740 706.44,710.14 706.44,692.14 U4.9 706.79,661.11 ; U4.24 618.55,446.08 636.55,446.08 648.93,458.45 648.93,631.59 678.45,661.11 706.79,661.11 ; U4.36@862,415 862,512 854,520 854,559.52 835,578.52 835,634 ; 863,662 862.92,661.92 ; 863.36,662.36 863.36,690.89 U4.1 ; U4.48@888,662 887.92,661.92 862.92,661.92 ; R15.2@1293,340 1294,339 1294,308.27 ; 1406,308.27 1294,308.27 ; 1406.54,308.27 1489.33,308.27 1519.09,338.03 R9.2 1677,340 JP1.1@1680,343 ; 1406.54,309.54 R10.2 ; 706.79,661.11 807.89,661.11 818,651 835,634 ; 835,634 862.92,661.92
  Top Layer w15: v1(511,984) 511.73,984.73 536.27,984.73 C27.2 616.2,985.46 622.46,985.46 U2.1@623,986
  Bottom Layer w10: v1@149,365 149,318 215,252 215,183 249,149 v1(271,149)
  Bottom Layer w15: v1@148,372.31 v1(148,634) 147.1,634.9 147.1,638.21 147,638.31 v1(147,907) 147,931 200,984 v1(511,984)
VCC5V: C6.2 C7.2 C8.2 C9.2 C14.2 C18.2 C20.2 C26.2 JP2.11 L1.2 R3.1 U2.3 U3.19 U5.19 U6.19 | length 2038.3
  Top Layer w6: 990,1025.99 990,881 1024.54,846.46 R3.1 ; C8.2@1026,1022 1026.97,1022 1034.73,1014.24 C8.2@1034.73,1013.27
  Top Layer w10: v1(121.52,801) C14.2 150.04,798.96 U5.19 ; v1(121.52,1074) C20.2 150.04,1071.96 U6.19 ; v1(122.52,534) C18.2 151.04,531.96 U3.19 ; 901,1061 902,1062 v1(902,1300)
  Bottom Layer w10: v1(121.52,801) 121.52,1024 ; v1(121.52,1074) 121.52,1024 ; v1@122.02,801 122.02,534.5 v1(122.52,534) ; v1(770,1024) 121.52,1024 ; v1(902,1300) 902,1363.74 JP2.11
VCC12V: C2.2 C3.2 C4.2 C5.2 D1.1 JP2.1 JP2.2 JP2.3 Q1.5 R1.1 R8.1 U1.1 U？1.7 | length 1030.1
  Top Layer w8: R1.1 1405.97,846.46 1442.43,810 1541,810 ; R8.1 1539.54,808.54 1541,810 ; 1593,810 1541,810 ; Q1.5@1644,880.36 1719.06,955.43 Q1.5@1723,955.43
  Top Layer w12: U？1.7 1556,523 1593,560 1593,810 1593,885 1597,889 ; v1(1863,876) 1881,876 1925.12,831.88 D1.1
  other v1: 1840,854 1840,876 1840,898 1863,898 1840,921 1863,921 1840,943 1863,943 1840,965 1863,965
VIN: C12.1 JP2.6 JP2.7 JP2.8 Q1.1 Q1.2 Q1.3 R7.1 | length 9.3
  Bottom Layer w30: JP2.7 JP2.7@1310,1358.59
  other v1: 1249,1181 1271,1181 1293,1181 1316,1181 1338,1181 1360,1181 1249,1204 1271,1204 1293,1204 1316,1204 1338,1204 1360,1204
VSENSE-A: R3.2 R6.1 U1.6 | length 255.1
  Top Layer w6: R3.2 1165.97,903.54 1177.73,915.31 1177.73,917.28 1204.46,944 1294,944 1304,954 U1.6@1304,987
XIN: C22.1 U4.5 Y1.3 | length 298.5
  Top Layer w6: U4.5 785.53,720.53 827,762 827,854.09 847.91,875 Y1.3@859,875 ; Y1.3@856,883 857.15,881.85 917.24,881.85 C22.1
XOUT: C21.1 U4.6 Y1.1 | length 238.5
  Top Layer w6: C21.1 775,809 Y1.1@783,817 ; U4.6@766,695 766,719 812,765 812,788.2 802.25,797.94 802.25,799.91 781.63,820.54 Y1.1
pads on no net: U3.21 U4.10 U5.21 U6.21

## Polygon pours and split planes (outlines as drawn)
GND on Top Layer "GND_L01_P002" (hatched 45Degree grid 20 track 8, remove dead copper, pour order 2): 118.36,0.25 cw(c118.36,118.36) 0.25,118.36 0.25,1340.72 cw(c118.36,1340.72) 118.36,1458.83 1878.99,1458.83 cw(c1878.99,1340.72) 1997.1,1340.72 1997.1,118.36 cw(c1878.99,118.36) 1878.99,0.25
GND on Bottom Layer "GND_L02_P000" (hatched 45Degree grid 20 track 8, remove dead copper, pour order 0): 118.36,0.25 cw(c118.36,118.36) 0.25,118.36 0.25,1340.72 cw(c118.36,1340.72) 118.36,1458.83 1878.99,1458.83 cw(c1878.99,1340.72) 1997.1,1340.72 1997.1,118.36 cw(c1878.99,118.36) 1878.99,0.25

## Other copper
Top Layer:
  region net NetC1_1: 1371.12,1093.12 1369,1091 1358,1091 1356.28,1092.72 1356.28,1128.51 1352.41,1132.39 1294.88,1132.39 1266.09,1103.59 1266.09,991.09 1248,973 1166,973 1156,983 1156,1143 1173.04,1160.04 1363.91,1160.04 1371.12,1152.83
  region net VCC12V: 1379.79,1132 1377.44,1129.65 1377.44,1093.58 1380.02,1091 1405,1091 1415,1081 1424,1072 1424,1013 1441,996 1558,996 1579,975 1579,867 1598.84,847.16 1872.16,847.16 1882,857 1882,989 1867,1004 1831,1004 1815,1020 1663,1020 1618,1065 1577,1106 1448,1106 1422,1132
  region net VCC5V: 1114,1137 1122,1129 1122,975 1116,969 1060,969 1053,976 1053,989 1042,1000 924,1000 874,950 728,950 716,962 716,1019 725,1028 782,1028 796,1014 851,1014 870,1033 870,1087 893,1110 1041,1110 1053,1122 1053,1129 1061,1137
  region net VIN: 1237,1232 1237,1175 1245,1167 1438,1167 1443,1172 1654,1172 1675,1151 1675,1070 1682,1063 1816,1063 1827,1074 1947,1074 1956,1083 1956,1231 1945,1242 1247,1242
Bottom Layer:
  region net VCC12V: 1681,1412 1665,1396 1665,1215 1753,1127 1753,971 1753,856 1776,833 1964,833 1983,852 1983,1388 1959,1412
  region net VIN: 1171,1423 1156,1408 1156,1186 1171,1171 1435,1171 1450,1186 1450,1403 1430,1423

## Silkscreen, mask and mechanical layers (free items; w line width, h text height)
Top Overlay:
  lines w10: 54,76 54,89 246,281 ; 54,109 54,128 209,283 ; 54,165 172,283 ; 54,242 96,284 ; 54,1196 54,1209 246,1401 ; 54,1229 54,1248 209,1403 ; 54,1285 172,1403 ; 54,1362 96,1404 ; 55,206 131,282 ; 55,1326 131,1402 ; 108,65 327,284 ; 108,1185 327,1404 ; 147,65 366,284 ; 147,1185 366,1404 ; 185,65 404,284 ; 185,1185 404,1404 ; 222,64 441,283 ; 222,1184 441,1403 ; 260,64 479,283 ; 260,1184 479,1403 ; 289,284 70,65 54,65 ; 289,1404 70,1185 54,1185 ; 299,64 518,283 ; 299,1184 518,1403 ; 337,64 556,283 ; 337,1184 556,1403 ; 375,65 594,284 ; 375,1185 594,1404 ; 413,65 632,284 ; 413,1185 632,1404 ; 452,65 671,284 ; 452,1185 671,1404 ; 490,65 709,284 ; 490,1185 709,1404 ; 527,64 746,283 ; 527,1184 746,1403 ; 565,64 784,283 ; 565,1184 784,1403 ; 604,64 823,283 ; 604,1184 823,1403 ; 642,64 861,283 ; 642,1184 861,1403 ; 681,65 900,284 ; 681,1185 900,1404 ; 719,65 938,284 ; 719,1185 938,1404 ; 758,65 977,284 ; 758,1185 977,1404 ; 796,65 1015,284 ; 796,1185 1015,1404 ; 833,64 1052,283 ; 833,1184 1052,1403 ; 871,64 1090,283 ; 871,1184 1090,1403 ; 910,64 1129,283 ; 910,1184 1129,1403 ; 948,64 1167,283 ; 948,1184 1167,1403 ; 986,65 1205,284 ; 986,1185 1205,1404 ; 1024,65 1243,284 ; 1024,1185 1243,1404 ; 1063,65 1282,284 ; 1063,1185 1282,1404 ; 1101,65 1320,284 ; 1101,1185 1320,1404 ; 1138,64 1357,283 ; 1138,1184 1357,1403 ; 1176,64 1395,283 ; 1176,1184 1395,1403 ; 1215,64 1434,283 ; 1215,1184 1434,1403 ; 1253,64 1472,283 ; 1253,1184 1472,1403 ; 1296,65 1515,284 ; 1296,1185 1515,1404 ; 1334,65 1553,284 ; 1334,1185 1553,1404 ; 1373,65 1592,284 ; 1373,1185 1592,1404 ; 1411,65 1630,284 ; 1411,1185 1630,1404 ; 1448,64 1667,283 ; 1448,1184 1667,1403 ; 1486,64 1705,283 ; 1486,1184 1705,1403 ; 1525,64 1744,283 ; 1525,1184 1744,1403 ; 1563,64 1782,283 ; 1563,1184 1782,1403 ; 1601,65 1820,284 ; 1601,1185 1820,1404 ; 1639,65 1858,284 ; 1639,1185 1858,1404 ; 1678,65 1897,284 ; 1678,1185 1897,1404 ; 1716,65 1935,284 ; 1716,1185 1935,1404 ; 1753,64 1961.32,272.32 ; 1753,1184 1961.32,1392.32 ; 1791,64 1962,235 ; 1791,1184 1962,1355 ; 1830,64 1962,196 ; 1830,1184 1962,1316 ; 1868,64 1962.5,158.5 ; 1868,1184 1962.5,1278.5 ; 1907,66 1963,122 ; 1907,1186 1963,1242 ; 1945,66 1961,82 1962,82 ; 1945,1186 1961,1202 1962,1202 ; 54,65 1962,65 1962,284 ; 54,65 54,284 ; 54,284 1962,284 ; 54,284 1962,284 ; 54,284 54,1185 ; 54,1185 1962,1185 ; 54,1185 54,1404 1962,1404 1962,1185 ; 54,1185 1962,1185 ; 1962,284 1962,1185
  text "DIO" at 1776,612 h60
  text "CLK" at 1777,537 h60
  text "GND" at 1777,462 h60
  text "VCC" at 1776,380 h60
Bottom Overlay:
  text "C95_TestBord" at 1945,1108 h60
  text "lyh" at 1411,1017.99 h60
  text "Ver0.2" at 1943,1005 h60
  text "2025/10/20" at 1945,908 h60
Mechanical 1:
  the board outline again, w0.5